# Altium PCB Mppt_PCB1.PcbDoc
Units mil, origin at the board's own origin, x right, y up, seen from the top; angles counter-clockwise.
Board outline 6000 x 4000 mil, 2 copper layers (Top Layer, Bottom Layer); 73 components, 45 nets, 234 pads, 35 vias.
Unrouted connection lines stored in the file: 1.
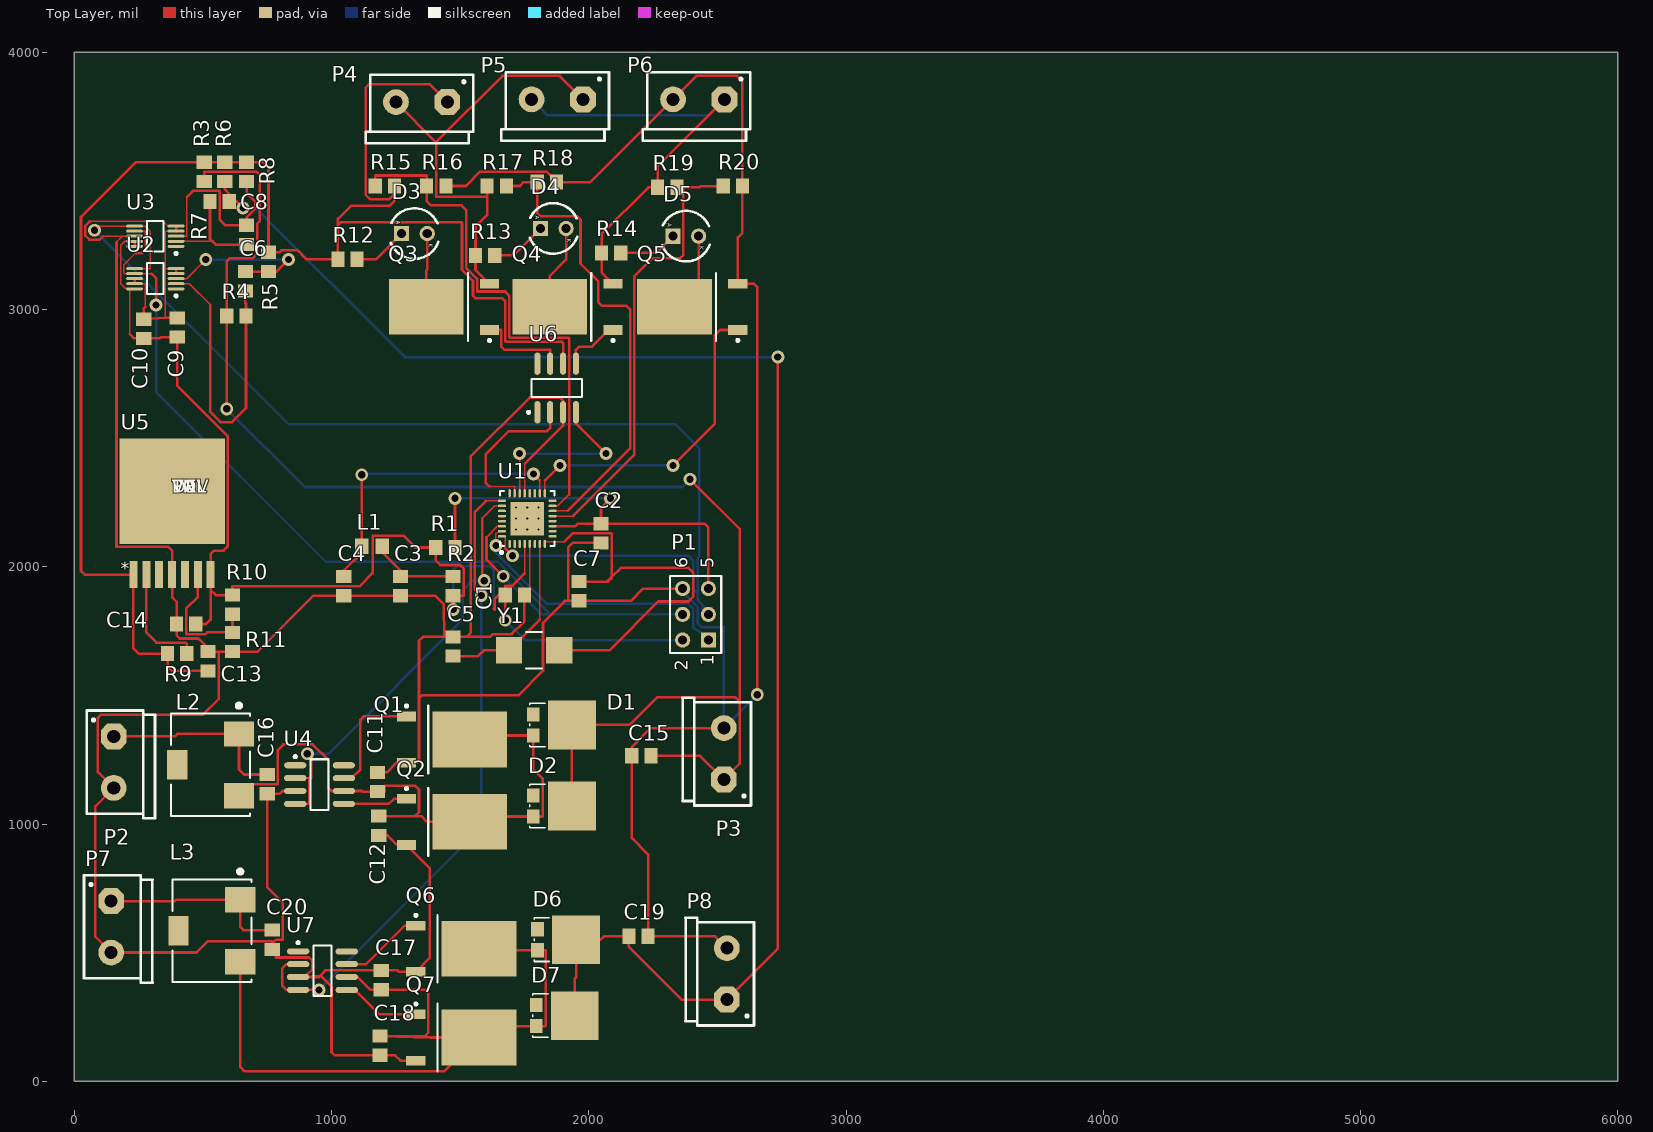
[diagram p0: Top Layer view]
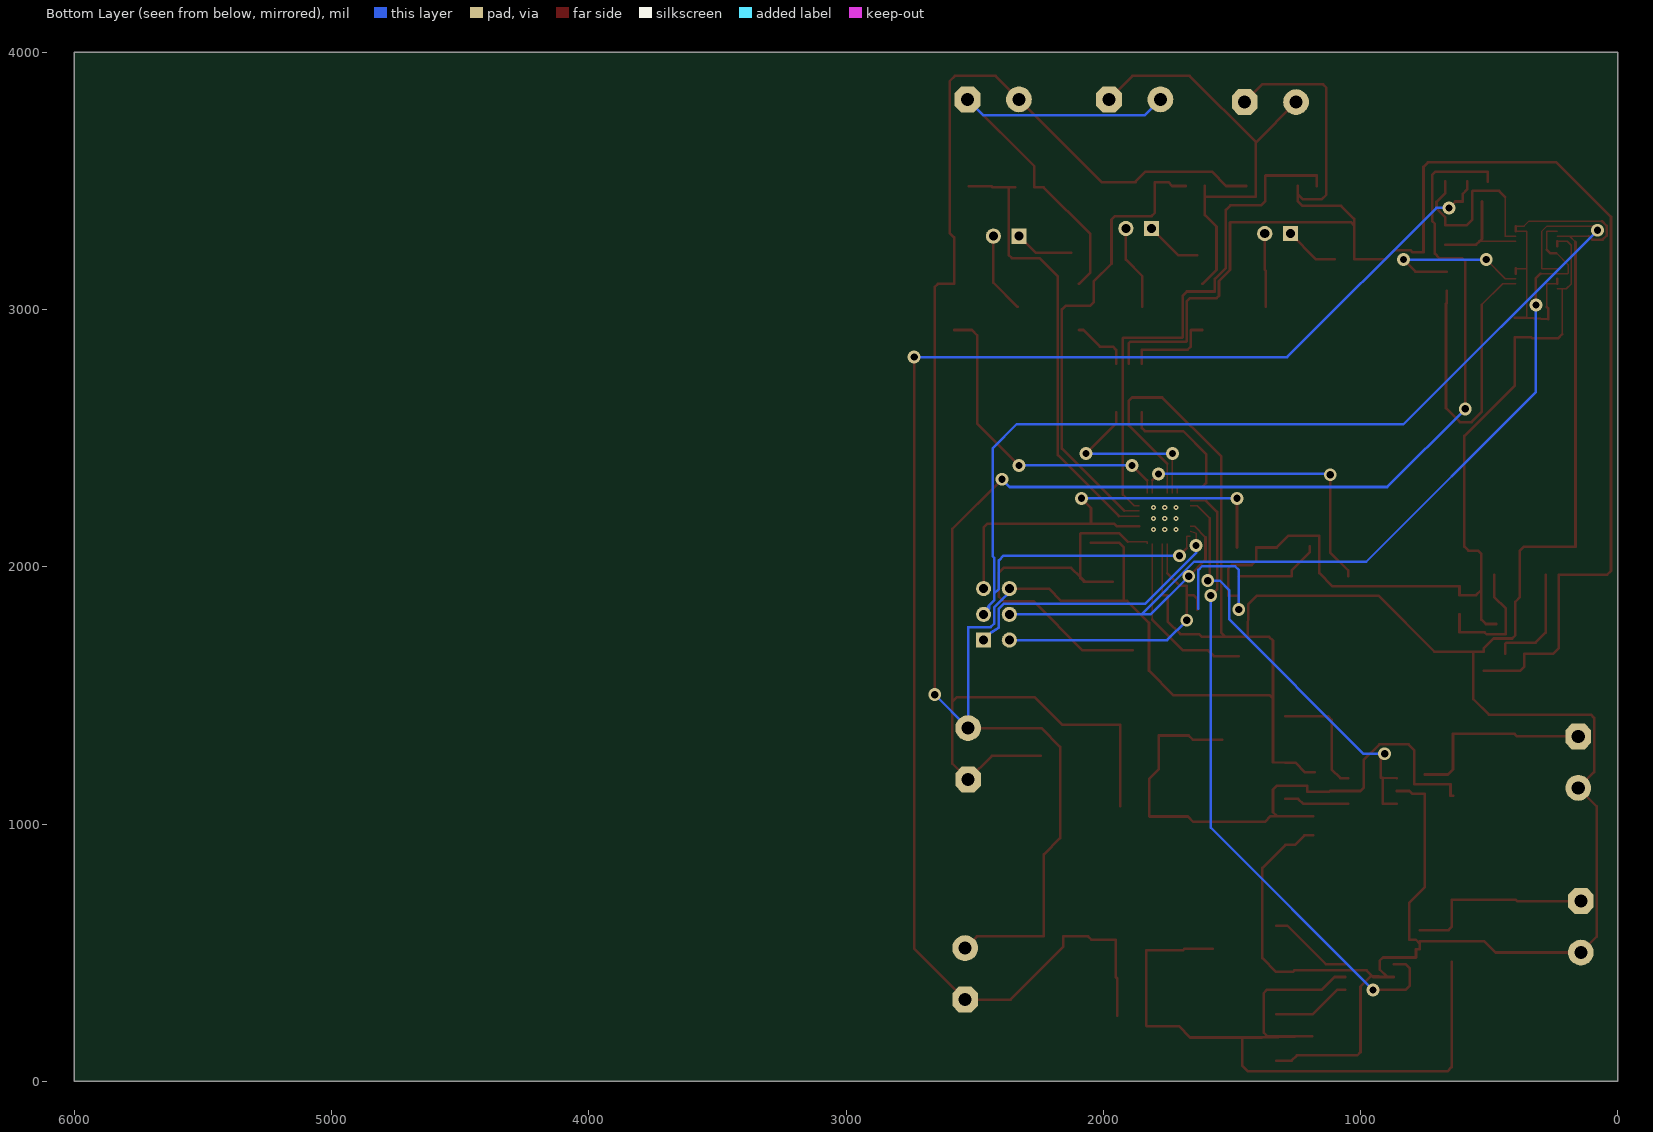
[diagram p1: Bottom Layer view, seen from below]
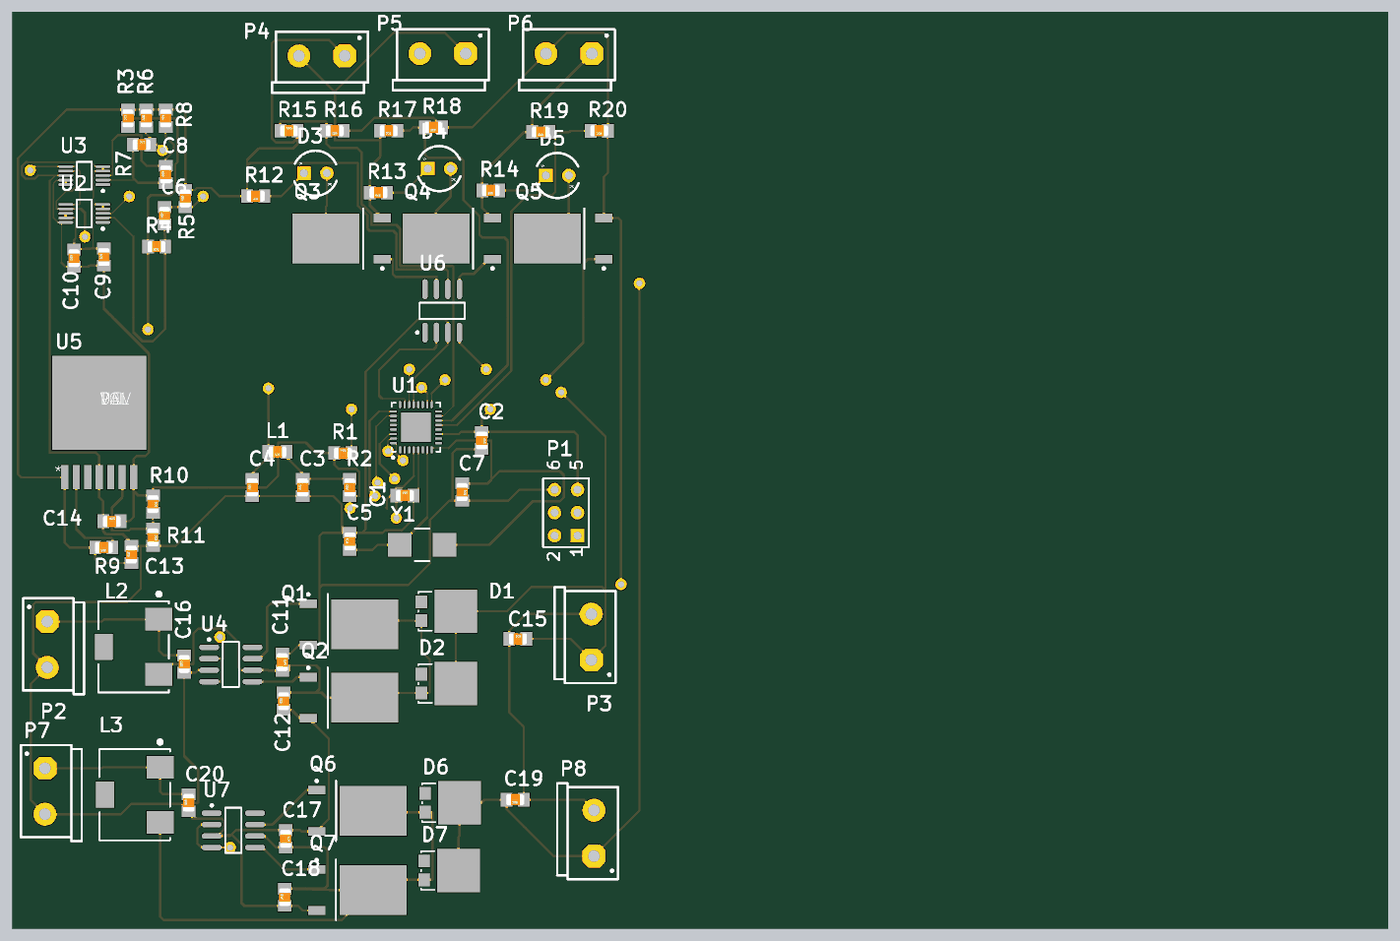
[diagram p2: 3D render of the assembled board from above, using the file's embedded part models]

## Layer stack, top to bottom
Top Solder: solder mask 0.4, Solder Resist, Dk 3.5
Top Layer: signal copper 1.4
Dielectric 1: dielectric 12.6, FR-4, Dk 4.8
Bottom Layer: signal copper 1.4
Bottom Solder: solder mask 0.4, Solder Resist, Dk 3.5

## Board outline
0,0 6000,0 6000,4000 0,4000

## Design rules (kind name [scope] priority, off if disabled: settings)
Clearance [All] p1: gap=6
PolygonConnect [All] p1: connectstyle=Relief reliefconductorwidth=10 reliefentries=4 polygonreliefangle="90 Angle" airgapwidth=10
RoomDefinition Balancer [InComponentClass('Balancer')] p1: confinementstyle=ConfineIn formatcopy=TRUE lockcomponents=FALSE outline 2680,2490 2680,3980 850,3980 850,2490
RoomDefinition Mppt_Sheet1 [InComponentClass('Mppt_Sheet1')] p2: confinementstyle=ConfineIn formatcopy=TRUE lockcomponents=FALSE outline 2600,1545 2600,2480 887.52,2480 887.52,1545
RoomDefinition CurrentSensor [InComponentClass('CurrentSensor')] p3: confinementstyle=ConfineIn formatcopy=TRUE lockcomponents=FALSE outline 825,2665 825,3770 30,3770 30,2665
RoomDefinition Buck [InComponentClass('Buck')] p4: confinementstyle=ConfineIn formatcopy=TRUE lockcomponents=FALSE outline 70,1515 850,1515 850,2630 70,2630
RoomDefinition Boost [InComponentClass('Boost')] p5: confinementstyle=ConfineIn formatcopy=TRUE lockcomponents=FALSE outline 24.03,3.28 2668.49,3.28 2668.49,1522.68 24.03,1522.68
RoutingVias [All] p1: holewidth=28 width=50 viastyle="Through Hole" minholewidth=28 minwidth=50 maxholewidth=28 maxwidth=50
SMDNeckDown [All] p1: percent=50.000
SolderMaskExpansion [All] p1: expansion=4
Width [All] p1: maxlimit=10 minlimit=4.92 preferedwidth=10
29 further rules are at their usual default settings.

## Classes and differential pairs
component class Balancer: D3 D4 D5 P4 P5 P6 Q3 Q4 Q5 R12 R13 R14 R15 R16 R17 R18 R19 R20 U6
component class Boost: C11 C12 C15 C16 C17 C18 C19 C20 D1 D2 D6 D7 L2 L3 P2 P3 P7 P8 Q1 Q2 Q6 Q7 U4 U7
component class Buck: C13 C14 R9 R10 R11 U5
component class CurrentSensor: C6 C8 C9 C10 R3 R4 R5 R6 R7 R8 U2 U3
component class Mppt_Sheet1: C1 C2 C3 C4 C5 C7 L1 P1 R1 R2 U1 Y1
net class Power: GND NetC13_1 NetC16_2 NetC20_2 NetP4_2

## Components (designator, comment, footprint, x,y, rotation, side; value= is the part's Value field where it differs from the comment)
C1 "Cap_cer_100n_50V" _0805 1712.52,1890 r0 top
C2 "Cap_cer_10n_50V" _0805 2047.52,2130 r270 top
C3 "Cap_cer_100n_50V" _0805 1267.52,1925 r90 top
C4 "Cap_cer_100n_50V" _0805 1047.52,1925 r90 top
C5 "Cap_cer_12p_50V" _0805 1472.52,1690 r90 top
C6 "Cap_cer_10n_50V" _0805 665,3110 r90 top
C7 "Cap_cer_12p_50V" _0805 1962.52,1905 r270 top
C8 "Cap_cer_10n_50V" _0805 670,3290 r90 top
C9 "Cap_cer_100n_50V" _0805 400,2930 r90 top
C10 "Cap_cer_100n_50V" _0805 270,2925 r90 top
C11 "Cap_cer_4.7u_50V" _0805 1178.49,1163.28 r270 top
C12 "Cap_cer_100n_50V" _0805 1183.49,993.28 r90 top
C13 "Cap_cer_10n_50V" _0805 520,1632.6 r90 top
C14 "Cap_cer_100n_50V" _0805 435,1777.6 r0 top
C15 "Cap_cer_100n_50V" _0805 2204.76,1265.08 r0 top
C16 "Cap_cer_100n_50V" _0805 749.76,1155.08 r90 top
C17 "Cap_cer_4.7u_50V" _0805 1193.49,393.28 r270 top
C18 "Cap_cer_100n_50V" _0805 1188.49,138.28 r90 top
C19 "Cap_cer_100n_50V" _0805 2193.49,563.28 r180 top
C20 "Cap_cer_100n_50V" _0805 769.76,550.08 r90 top
D1 "V10P45S" TO-277A 1893.31,1385.08 r270 top
D2 "V10P45S" TO-277A 1893.31,1070.08 r270 top
D3 "LED_5mm" LED_5MM 1322.17,3300.24 r270 top
D4 "LED_5mm" LED_5MM 1862.17,3320.24 r270 top
D5 "LED_5mm" LED_5MM 2377.17,3290.24 r270 top
D6 "V10P45S" TO-277A 1909.76,550.08 r270 top
D7 "V10P45S" TO-277A 1904.76,255.08 r270 top
L1 "IND_47u_0A055" COIL_0805 1157.52,2080 r180 top
L2 "HCF1007" HCF1007 530,1230 r270 top
L3 "HCF1007" HCF1007 535,585 r270 top
P1 "Header 3X2" HDR2X3 2465,1715 r90 top
P2 "WRTBL_2P_508" WRTBL_2P_508 145,1240 r270 top
P3 "WRTBL_2P_508" WRTBL_2P_508 2533.49,1273.28 r90 top
P4 "WRTBL_2P_508" WRTBL_2P_508 1350,3815 r180 top
P5 "WRTBL_2P_508" WRTBL_2P_508 1877.17,3825.24 r180 top
P6 "WRTBL_2P_508" WRTBL_2P_508 2427.17,3825.24 r180 top
P7 "WRTBL_2P_508" WRTBL_2P_508 135,600 r270 top
P8 "WRTBL_2P_508" WRTBL_2P_508 2545.16,417.91 r90 top
Q1 "IRFR024N" TO-252AA_N 1468.49,1328.28 r0 top
Q2 "IRFR024N" TO-252AA_N 1468.49,1008.28 r0 top
Q3 "IRFR024N" TO-252AA_N 1437.17,3010.24 r180 top
Q4 "IRFR024N" TO-252AA_N 1917.17,3010.24 r180 top
Q5 "IRFR024N" TO-252AA_N 2402.17,3010.24 r180 top
Q6 "IRFR024N" TO-252AA_N 1505,515 r0 top
Q7 "IRFR024N" TO-252AA_N 1504.76,170.08 r0 top
R1 "Res_0805" _0805 1442.52,2075 r0 top
R2 "Res_0805" _0805 1472.52,1925 r90 top
R3 "Res_0805" _0805 505,3535 r90 top
R4 "Res_0805" _0805 630,2975 r180 top
R5 "Res_0805" _0805 755,3185 r90 top
R6 "Res_0805" _0805 585,3535 r90 top
R7 "Res_0805" _0805 565,3420 r0 top
R8 "Res_0805" _0805 670,3535 r90 top
R9 "Res_0805" _0805 400,1662.6 r180 top
R10 "Res_0805" _0805 615,1852.6 r270 top
R11 "Res_0805" _0805 615,1707.6 r270 top
R12 "Res_0805" _0805 1062.17,3195.24 r180 top
R13 "Res_0805" _0805 1597.17,3210.24 r180 top
R14 "Res_0805" _0805 2087.17,3220.24 r180 top
R15 "Res_0805" _0805 1207.17,3480.24 r0 top
R16 "Res_0805" _0805 1407.17,3480.24 r180 top
R17 "Res_0805" _0805 1642.17,3480.24 r180 top
R18 "Res_0805" _0805 1837.17,3495.24 r180 top
R19 "Res_0805" _0805 2305,3475 r180 top
R20 "Res_0805" _0805 2560,3480 r180 top
U1 "ATtiny26L-8MU" 32M1-A_N 1760.83,2187.4 r90 top
U2 "MAX9611AUB+" MAXM-U10+2_N 315,3120 r180 top
U3 "MAX9611AUB+" MAXM-U10+2_N 315,3285 r180 top
U4 "MAX4427ESA" NSO8_N 953.49,1153.28 r0 top
U5 "LMZ12001_NDW_7" TZA07A 380,2287.6 r0 top
U6 "MAX4427ESA" NSO8_N 1875,2695 r90 top
U7 "MAX4427ESA" NSO8_N 964.76,430.08 r0 top
Y1 "Crystal_16.0MHz" XTAL_SMD 1787.52,1675 r180 top

## Footprints (in the part's own frame and the unit in brackets; to place one, negate y for a bottom-side part, rotate by r counter-clockwise, add the part's x,y. Pads: shape width x height; smd on the part's side, far side on the other; paste and mask are expansions set on the pad)
32M1-A_N [mm] "QFN, 32-Leads, Body 5x5mm, Pitch 0.5mm, Thermal Pad 3.3x3.3mm, IPC Medium Density"
  oval 0.8x0.25 smd: 1(-2.5,1.75) 2(-2.5,1.25) 3(-2.5,0.75) 4(-2.5,0.25) 5(-2.5,-0.25) 6(-2.5,-0.75) 7(-2.5,-1.25) 8(-2.5,-1.75) 17(2.5,-1.75) 18(2.5,-1.25) 19(2.5,-0.75) 20(2.5,-0.25) 21(2.5,0.25) 22(2.5,0.75) 23(2.5,1.25) 24(2.5,1.75)
  oval 0.25x0.8 smd: 9(-1.75,-2.5) 10(-1.25,-2.5) 11(-0.75,-2.5) 12(-0.25,-2.5) 13(0.25,-2.5) 14(0.75,-2.5) 15(1.25,-2.5) 16(1.75,-2.5) 25(1.75,2.5) 26(1.25,2.5) 27(0.75,2.5) 28(0.25,2.5) 29(-0.25,2.5) 30(-0.75,2.5) 31(-1.25,2.5) 32(-1.75,2.5)
  rect 3.3x3.3 smd: 33(0,0)
  silkscreen extent -3.47,-2.7 2.7,2.7, body extent -2.55,-2.55 2.55,2.55, height 1
_0805 [mm]
  rect 1.3x1.5 smd: 1(-0.95,0) 2(0.95,0)
  body extent -1,-0.64 1,0.62, height 0.78
COIL_0805 [mm]
  rect 1.3x1.5 smd: 1(-1.014,0) 2(1.014,0)
  body extent -1,-0.64 1,0.62, height 0.78
HCF1007 [mm]
  rect 2.5x3 smd: 1(-3.05,2.8) 2(3.05,2.8)
  rect 2.9x2 smd: ""(0,-3.3)
  silkscreen extent -6.04,-3.9 5.05,3.9
HDR2X3 [mm] "Connector; Header; 3x2 Position"
  rect 1.5x1.5 hole 0.9: 1(0,0)
  round 1.5 hole 0.9: 2(0,2.54) 3(2.54,0) 4(2.54,2.54) 5(5.08,0) 6(5.08,2.54)
  silkscreen extent -1.27,-1.27 6.35,3.81, body extent -0.3,-0.29 5.38,2.84, height 7
LED_5MM [mm]
  rect 1.5x1.5 hole 0.9: 1(0.127,-1.27)
  round 1.5 hole 0.9: 2(0.127,1.27)
  silkscreen extent -2.37,-2.33 2.63,2.36, body extent -2.36,-2.49 2.62,2.5, height 8.5
MAXM-U10+2_N [mm] "SOP, 10-Leads, Body 3x3mm, Pitch 0.5mm, IPC Medium Density"
  oval 1.65x0.3 smd: 1(-2.05,1) 2(-2.05,0.5) 3(-2.05,0) 4(-2.05,-0.5) 5(-2.05,-1) 6(2.05,-1) 7(2.05,-0.5) 8(2.05,0) 9(2.05,0.5) 10(2.05,1)
  silkscreen extent -2.18,-1.53 0.82,1.82, body extent -1.55,-1.55 1.55,1.55, height 1.1
NSO8_N [mm] "SOIC, 8-Leads, Body 4.9x3.9mm, Pitch 1.27mm, IPC Medium Density"
  oval 2.2x0.6 smd: 1(-2.4,1.905) 2(-2.4,0.635) 3(-2.4,-0.635) 4(-2.4,-1.905) 5(2.4,-1.905) 6(2.4,-0.635) 7(2.4,0.635) 8(2.4,1.905)
  silkscreen extent -2.52,-2.5 0.9,2.88, body extent -2,-2.5 2,2.5, height 1.75
TO-252AA_N [mm] "D-PAK, 4-Leads, Body 6.1x6.5mm, Pitch 2.28mm, Lead Span 9.9mm, IPC Medium Density"
  rect 1.9x0.95 smd: 1(-4.5,2.28) 3(-4.5,-2.28)
  rect 7.4x5.5 smd: 4(1.75,0)
  silkscreen extent -4.62,-3.35 -2.35,3.43, body extent -2.25,-3.37 4.1,3.37, height 2.38
TO-277A [mm]
  rect 1.4x1.27 smd: 1(1.04,-2.765) 2(-1.04,-2.765)
  rect 4.8x4.72 smd: K(0,1.04)
  silkscreen extent -2.15,-3.1 2.15,-1.6
TZA07A [mil]
  rect 31x105 smd: 1(-150,-318) 2(-100,-318) 3(-50,-318) 4(0,-318) 5(50,-318) 6(100,-318) 7(150,-318)
  rect 410x410 smd: 8(0,6)
WRTBL_2P_508 [mm]
  oct 2.54x2.54 hole 1.3: 1(-2.549,0.212)
  round 2.54 hole 1.3: 2(2.531,0.212)
  silkscreen extent -5.11,-2.47 5.51,4.29, body extent -4.83,-2.41 5.21,4.27, height 13.97
XTAL_SMD [mm]
  rect 2.6x2.6 smd: 1(-2.476,0) 2(2.476,0)
  silkscreen extent -0.8,-1.8 0.8,1.8, body extent -2.4,-1.8 2.4,1.8, height 1.4

## Part data
C1 C3 C4 C9 C10 C11 C12 C14 C15 C16 C17 C18 C19 C20: library part Cap_124
C2 C6 C8 C13: library part Cap_120
C5 C7: library part Cap_109
D1 D2 D6 D7: "V01P45 Shottky Diode"
D3 D4 D5: library part DIODE_41
L1: library part Ind_41, "Inductor"
L2 L3: "HCF1007 Inductor"
P1: library part Con_41
P2 P3 P4 P5 P6 P7 P8: library part Con_7
Q1 Q2 Q3 Q4 Q5 Q6 Q7: "HEXFET N-Channel Power MOSFET"
R1 R2 R3 R4 R5 R6 R7 R8 R9 R10 R11 R12 R13 R14 R15 R16 R17 R18 R19 R20: library part Res_6
U1: "8-bit AVR Microcontroller, 2.7-5.5V, 8MHz, 2KB Flash, 128 Bytes EEPROM, 128 Bytes SRAM, 32-pin MLF, Industrial Grade (-40°C to 85°C), Pb-Free"
U2 U3: "High-side Current-Sense Amplifier with 12-bit I2C ADC and Op Amp / Comparator - Non-inverting, Adjustable Gain, -40 to 125 degC, 10-Pin SOP (U10+2), Pb-Free"
U4 U6 U7: "Dual High-Speed 1.5A MOSFET Driver"
U5: "Imported"
Y1: library part Crystal_19

## Via types
v1: diameter 50, hole 28, Top Layer to Bottom Layer, 26 vias
v2: diameter 19.68, hole 7.87, Top Layer to Bottom Layer, 9 vias

## Nets (pads, with @x,y where several pads share a name; then routed paths per layer and width w, separated by ;. In a path a pad name is that pad's centre, name@x,y a point inside that pad or via, vN(x,y) a via of type N, cw(c..) or ccw(c..) an arc to the next point about the centre after c; other vN are vias at no path point)
+5V: C1.1 C9.1 C10.1 C14.2 P1.2 R1.1 R2.1 R10.1 U1.4 U2.10 U3.9 U3.10 U5.7 | length 5063
  Top Layer w4.92: 1750.99,1974.44 U1.4
  Top Layer w5.91: 215.52,2904.08 U2.10@215.52,3080.63 ; U2.10 U2.10@215.52,3080.63 ; U3.9 196.27,3265.31 180.95,3250 180.95,3099.68 200,3080.63 U2.10@215.52,3080.63
  Top Layer w10: 215.52,2904.08 232,2887.6 C10.1 332,2887.6 337,2892.6 C9.1 400,2705 596,2509 596,2078 580.5,2062.5 542.5,2062.5 530,2050 U5.7 530,1910 ; U3.10 U3.9 ; C14.2 512.5,1777.6 530,1795.1 530,1910 ; v1(1473,1834) 1472.52,1834.48 R2.1 1513,1887.6 1514,1888.6 1514,1993 1500,2007 1423.12,2007 1405.12,2025 R1.1 1326,2075 1280,2121 1161,2121 1160,2120 1160,1975 1110,1925 616,1925 615,1924 R10.1 550,1890 530,1910 ; 1630,1837 1634,1833 1634,1875 1649,1890 C1.1 ; v1(1675.12,1791.88) C1.1 ; 1750.99,1974.44 1703.52,1926.98 1677,1926.98 1675.12,1925.09 C1.1
  Bottom Layer w10: v1(1473,1834) 1473,1987.5 1487.5,2002 1615.5,2002 1630,1987.5 1630,1837 ; v1(1675.12,1791.88) 1752,1715 P1.2
GND: C1.2 C2.2 C3.1 C4.1 C5.2 C7.2 C9.2 C10.2 C11.1 C12.1 C13.2 C14.1 C15.1 C16.1 C17.1 C18.1 C19.1 C20.1 P1.6 P2.2 P3.2 P6.2 P7.2 P8.2 Q1.3 Q2.3 Q5.3 Q6.3 Q7.3 R11.2 R16.1 R18.1 R20.1 U1.5 U1.21 U2.4 U2.5 U2.8 U2.9 U3.4 U3.5 U3.8 U4.3 U5.4 U6.3 U7.3 | length 20597
  Top Layer w4.92: U1.21 1750.99,2400 ; C1.2@1770.67,1890 U1.5
  Top Layer w5.91: 61.55,3344 344.37,3344 364,3324.37 U3.5 ; 112.5,3285 186.5,3285 ; 164,3262.5 186.5,3285 ; U2.9 275,3100.31 276,3099.31 276,3010 ; U3.8 186.5,3285 ; 353,2968.4 353,3158.37 354,3159.37 U2.5 353,3160.37 354,3304.69 U3.4
  Top Layer w10: 61.55,3344 42.55,3325 42.55,3287.5 58.54,3271.51 99.01,3271.51 112.5,3285 ; 164,3262.5 164,2078 165,2077 365.5,2077 380,2062.5 U5.4 380,1881.6 397.6,1864 C14.1 397.6,1733.82 410.35,1721.07 482.93,1721.07 520,1684 C13.2 560,1670 ; U2.9 U2.8 ; 276,3010 270,3004 C10.2 356.4,2967.4 ; 353,2968.4 354,2967.4 356.4,2967.4 ; U2.4 U2.5 ; U3.4 U3.5 ; C9.2 356.4,2967.4 ; U4.3 809.61,1128.28 799,1117.68 C16.1 749.76,754.24 811,693 811,551 810,550 784.76,550 C20.1@769.76,535 ; C11.1 1215,1200.69 1252.83,1238.52 Q1.3 1340,1239.52 1340,1487.5 ; C12.1 1218,955.88 1255.36,918.52 Q2.3 1381,828.84 1381,478.4 Q6.3 1262.45,425.24 1257,430.68 C17.1 976.68,430.68 956.79,410.79 ; Q7.3 1267.57,80.31 1247,100.88 C18.1 1012.5,100.88 1000,113.38 1000,367.58 956.79,410.79 ; R16.1 1522.28,3480.24 1578.04,3536 1836,3536 1874.57,3497.43 R18.1 2005.87,3495.24 P6.2 2418.63,3908 2576.9,3908 2597.4,3887.5 R20.1 2597.4,3298.07 2579.33,3280 Q5.3 2642.5,3100 2655,3087.5 v1(2655,1502.76) ; 1750.99,2400 1900,2549.01 U6.3 1900,2645.5 1887.5,2658 1771,2658 1541,2428 1541,1743.4 1525,1727.4 ; C1.2@1770.67,1890 C1.2 1749.92,1787.92 1700,1738 1627,1738 1616.4,1727.4 1525,1727.4 ; C2.2 1937.5,2092.6 1921,2076.1 1921,1868.6 1922,1867.6 ; P1.6 2211.4,1915 2164,1867.6 C7.2 1922,1867.6 ; P3.2 2240.28,1372.91 2167.36,1300 C15.1 2167.36,945.53 2230.89,882 C19.1 2491.08,563.28 P8.2 ; 560,1670 567,1670 567.2,1670.2 R11.2 713.2,1670.2 930.6,1887.6 C4.1 C3.1 1401.4,1887.6 1436.6,1852.4 1438,1727.4 ; 560,1670 561,1669 561,1485 501,1425 104.5,1425 92,1412.5 92,1201.7 P2.2 82,1069.04 82,561.7 P7.2 474.37,500.37 519,545 768.76,545 769.76,544 C20.1@769.76,535 ; C20.1@769.76,535 C20.1 784,512.68 784,482 785,481 912.5,481 925,468.5 925,434.5 U7.3@897.37,406.87 ; U7.3@895.58,405.08 U7.3@897.37,406.87 ; U7.3@895.58,405.08 951.08,405.08 956.79,410.79 ; U7.3@895.58,405.08 U7.3 U7.3@897.37,406.87 ; U7.3@897.37,406.87 956.79,410.79 ; 1340,1487.5 1340,1712.5 1354.9,1727.4 1438,1727.4 ; 1340,1487.5 1352.5,1500 1726,1500 1822,1596 1822,1782 1907.6,1867.6 1922,1867.6 ; 1438,1727.4 C5.2 1525,1727.4
  Bottom Layer w10: P1.6 2365,1900.55 2393.55,1872 2394.13,1872 2424,1842.13 2424,1778.5 2437.5,1765 2525,1765 2525.16,1764.84 P3.2 v1(2655,1502.76)
NetC2_1: C2.1 P1.5 R1.2 U1.11 | length 1763.5
  Top Layer w10: R1.2 v1(1479.92,2266) ; U1.11 1948,2157.87 1957.53,2167.4 C2.1 ; v1(2085.02,2266) 2047.52,2228.5 C2.1 ; P1.5 2465,2152.4 2450,2167.4 C2.1
  Bottom Layer w10: v1(1479.92,2266) v1(2085.02,2266)
NetC3_2: C3.2 L1.1 R2.2 | length 351.6
  Top Layer w10: L1.1 1197.42,2056.1 1267.52,1986 C3.2 R2.2
NetC4_2: C4.2 L1.2 U1.18 | length 1178.6
  Top Layer w4.92: U1.18 1810.04,2335.96
  Top Layer w10: C4.2 1047.52,1986 1117.62,2056.1 L1.2 v1(1117.62,2357.62) ; v1(1785,2361) 1810.04,2335.96
  Bottom Layer w10: v1(1117.62,2357.62) 1121,2361 v1(1785,2361)
NetC5_1: C5.1 U1.7 Y1.2 | length 690.5
  Top Layer w4.92: 1810.04,1795 U1.7
  Top Layer w10: C5.1 1570,1652.6 1592.4,1675 Y1.2 1810.04,1795
NetC6_1: C6.1 R4.1 U2.2 | length 1218
  Top Layer w5.91: U2.2 447.19,3100.31 529,3018.5
  Top Layer w10: 529,3018.5 529,2602 568.5,2562.5 613.5,2562.5 667.4,2616.4 R4.1 667.4,3022 665,3024.4 C6.1
NetC6_2: C6.2 R5.1 U2.3 | length 655.2
  Top Layer w5.91: U2.3 437,3120 v1(511,3194)
  Top Layer w10: C6.2 698.47,3147.4 698.67,3147.6 R5.1 786.6,3147.6 v1(833,3194)
  Bottom Layer w10: v1(511,3194) v1(833,3194)
NetC7_1: C7.1 U1.8 Y1.1 | length 1652.1
  Top Layer w4.92: U1.8 1829.73,2097 1904,2097
  Top Layer w10: Y1.1 2080,1675 2270,1865 2387.5,1865 2406,1883.5 2406,1977.5 2387.5,1996 2125,1996 2089,1960 ; 1904,2097 1937,2130 2088,2130 2089,2129 2089,1960 ; C7.1 2071.4,1942.4 ; 2071.4,1942.4 2089,1960 ; 2071.4,1942.4 2075,1942.4 2089,1956.4 2089,1960
NetC8_1: C8.1 R7.1 U3.2 | length 438.3
  Top Layer w5.91: U3.2 537.28,3265.31
  Top Layer w10: R7.1 527.6,3275 537.28,3265.31 550,3252.6 C8.1
NetC8_2: C8.2 R8.1 U3.3 | length 754.5
  Top Layer w5.91: U3.3 437,3285 438,3286 438,3437.5
  Top Layer w10: 438,3437.5 461.5,3461 564,3461 565,3460 565,3349.9 587.5,3327.4 C8.2 670,3358 704.5,3392.5 704.5,3418.72 670,3453.22 R8.1
NetC11_2: C11.2 C12.2 D1.1 D2.1 L2.2 Q1.4 Q2.4 U4.6 | length 2402.6
  Top Layer w10: L2.2 650,1109.92 650,1155 790,1155 791,1156 791,1287.5 812.96,1309.46 926.75,1309.46 987.5,1248.71 987.5,1140.78 1000,1128.28 U4.6 1118.28,1128.28 1120.69,1125.88 C11.2 1207,1125.88 1207,1149 1325,1149 1340,1134 1340,1045.69 1325,1030.69 ; C12.2 1325,1030.69 ; Q1.4 1652,1328.28 1667.85,1344.13 D1.1 1784.45,1212.55 1821,1176 1821,1030.13 1820,1029.13 D2.1 1670.85,1029.13 1650,1008.28 Q2.4 1371.4,1008.28 1349,1030.69 1325,1030.69
NetC13_1: C13.1 P4.1 R3.2 R5.2 R6.2 R8.2 R9.2 R12.2 R15.2 U5.1 U6.6 | length 6419.9
  Top Layer w10: U5.1 U5.1@230,1969 ; C13.1 379.9,1595.2 362.6,1612.5 R9.2 250,1662.6 230,1682.6 U5.1@230,1969 ; R15.2 1244.57,3448.57 ; P4.1 1382.04,3875 1145.5,3875 1133,3862.5 1133,3446 1150,3429 1225,3429 1244.57,3448.57 ; U6.6 1900,2869 1894.03,2874.97 1676.63,2874.97 1675.6,2876 1675.6,3030.9 1662.5,3044 1559,3044 1549.93,3053.07 1549.93,3110.95 1507.17,3153.71 1507.17,3337.5 1504.64,3340.03 1037.5,3340.03 1024.76,3327.29 ; U5.1@230,1969 41,1969 26,1984 26,3360 238.4,3572.4 R3.2 R6.2 585,3573 627,3573 627.6,3572.4 R8.2 737.5,3572.4 755,3554.9 R5.2 797.05,3222.4 805.6,3230.96 867.45,3230.96 903.17,3195.24 R12.2 1024.76,3327.29 ; 1024.76,3327.29 1024.76,3352.76 1075,3403 1225,3403 1244.57,3422.57 1244.57,3448.57
NetC15_2: C15.2 D1.K D2.K P3.1 R3.1 R4.2 | length 5824.9
  Top Layer w10: R3.1 505,3534 506,3535 710,3535 720.5,3524.5 720.5,3343 711,3333.5 711,3217 694,3200 605.1,3200 592.6,3187.5 R4.2 v1(592.6,2613.9) ; D2.K D1.K 2159.08,1385.08 2266,1492 2570,1492 2587,1475 ; C15.2 2432.99,1265.08 P3.1 2587,1234.76 2587,1475 ; v1(2394,2340) 2587,2147 2587,1475
  Bottom Layer w10: v1(592.6,2613.9) 896.5,2310 2364,2310 v1(2394,2340)
NetC16_2: C16.2 L2.1 P2.1 | length 746.5
  Top Layer w10: P2.1 391,1340.37 400.71,1350.08 L2.1 640.24,1212.26 660.02,1192.48 C16.2
NetC17_2: C17.2 C18.2 D6.1 D7.1 L3.2 Q6.4 Q7.4 U7.6 | length 3255.7
  Top Layer w10: L3.2 645.24,55.26 662.5,38 1437.5,38 1460,60.5 Q7.4@1460,170.08 ; U7.6 1101,405.08 1150.2,355.88 C17.2 1362.5,355.88 1376,342.38 1376,189.18 1362.5,175.68 C18.2 1383.61,170.08 Q7.4@1460,170.08 ; Q6.4 1684,515 1689.87,509.13 D6.1 1831,509.13 1832,508.13 1832,215.13 1831,214.13 D7.1 1706.06,214.13 1662,170.08 Q7.4 Q7.4@1460,170.08
NetC19_2: C19.2 D6.K D7.K P8.1 R6.1 R7.2 | length 6062.2
  Top Layer w10: R6.1 585,3467.4 602.4,3450 R7.2 631,3420 v1(656,3395) ; D7.K 1945.71,400 1950.71,405 D6.K 2046,550.08 2059.21,563.28 C19.2 2156.09,522 2360.54,317.54 P8.1 2735,515.72 v1(2735,2815)
  Bottom Layer w10: v1(656,3395) 705.01,3395 1285.01,2815 v1(2735,2815)
NetC20_2: C20.2 L3.1 P7.1 | length 738.8
  Top Layer w10: P7.1 391,700.37 395.71,705.08 L3.1 645.24,599.76 657.52,587.48 C20.2
NetD3_1: D3.1 R12.1 | length 214
  Top Layer w10: R12.1 1172.17,3195.24 D3.1
NetD3_2: D3.2 Q3.4 | length 286.6
  Top Layer w10: Q3.4 1368.27,3150 1372.17,3153.9 D3.2
NetD4_1: D4.1 R13.1 | length 221.1
  Top Layer w10: R13.1 1707.17,3210.24 D4.1
NetD4_2: D4.2 Q4.4 | length 331.5
  Top Layer w10: Q4.4 1848.27,3130 1912.17,3193.9 D4.2
NetD5_1: D5.1 R14.1 | length 229.5
  Top Layer w10: R14.1 2262.17,3220.24 D5.1
NetD5_2: D5.2 Q5.4 | length 313.9
  Top Layer w10: Q5.4 2427.17,3104.13 D5.2
NetP1_1: P1.1 U1.31 | length 1110.4
  Top Layer w4.92: v1@1638,2084 1638,2130.89 U1.31
  Top Layer w10: v1@1638,2084 v1(1639,2083)
  Bottom Layer w10: v1(1639,2083) 1639,2054 1837,1856 2387.5,1856 2406.81,1836.69 2406.81,1762.5 2434.52,1745.48 P1.1
NetP1_3: P1.3 U1.32 U2.6 U3.6 | length 4791.8
  Top Layer w4.92: U1.32 1674.54,2118.5 1674.54,2072.46
  Top Layer w5.91: v1@95.37,3324.37 U3.6 275,3324.37 296,3303.37 296,3160.37 295,3159.37 U2.6
  Top Layer w10: v1(79,3308) v1@95.37,3324.37 ; 1674.54,2072.46 v1(1704,2043)
  Bottom Layer w10: v1(79,3308) 833,2554 2336.52,2554 2430,2460.52 2430,2041 2424,2035 2424,1895.66 ; v1(1704,2043) 2388,2043 2406,2025 2406,1913.66 2424,1895.66 ; 2424,1895.66 2424,1869.5 2443.53,1849.97 ; 2443.53,1849.97 P1.3 2443.53,1836.47 2443.53,1849.97
NetP1_4: P1.4 U1.30 U2.7 U3.7 | length 3736.3
  Top Layer w4.92: 1602.54,2115.41 1645,2157.87 U1.30
  Top Layer w5.91: U3.7 275,3304.69 276,3303.69 276,3233 ; 238.36,3219.5 192.86,3174 192.86,3140.83 194,3139.69 U2.7 300,3139.69
  Top Layer w10: 238.36,3219.5 262.5,3219.5 276,3233 ; 300,3139.69 318,3121.69 v1(318,3018) ; 1602.54,2115.41 1602.54,2027.96 v1(1667.52,1962.98)
  Bottom Layer w10: v1(318,3018) 318,2679 977.5,2019.5 1647,2019.5 1851.5,1815 ; v1(1667.52,1962.98) 1815.5,1815 1851.5,1815 ; P1.4 1851.5,1815
NetP4_2: P4.2 P5.1 Q3.3 R13.2 R17.2 | length 1767.3
  Top Layer w10: P4.2 1407,3650.04 ; R17.2 1604.76,3440 ; Q3.3 1559.76,3154.57 R13.2 1559.76,3322 1604.76,3367 1604.76,3440 ; P5.1 1886.44,3908 1664,3908 1407,3651 1407,3650.04 ; 1407,3650.04 1407,3440 1408,3439 1603.76,3439 1604.76,3440
NetP5_2: P5.2 P6.1 Q4.3 R14.2 R19.2 | length 1755.4
  Top Layer w10: Q4.3 2049.76,3144.57 R14.2 2049.76,3292.76 2232,3475 R19.2 2267.6,3556.97 P6.1
  Bottom Layer w10: P5.2 1839.44,3755 2465.63,3755 P6.1
NetQ1_1: Q1.1 U4.7 | length 455.5
  Top Layer w10: U4.7 1077.78,1178.28 1112,1212.5 1112,1405.05 1125,1418.05 Q1.1
NetQ2_1: Q2.1 U4.5 | length 251.5
  Top Layer w10: U4.5 1222.24,1078.28 1242,1098.05 Q2.1
NetQ3_1: Q3.1 U6.7 | length 358.2
  Top Layer w10: Q3.1 1658.12,2920.47 1659.6,2919 1659.6,2855.9 1671.5,2844 1849,2844 1850,2843 U6.7
NetQ4_1: Q4.1 U6.5 | length 230.2
  Top Layer w10: U6.5 1950,2843.5 1962.5,2856 2012.53,2856 2077,2920.47 Q4.1
NetQ5_1: Q5.1 U1.17 | length 1242.8
  Top Layer w4.92: U1.17 1829.73,2336
  Top Layer w10: 1829.73,2336 v1(1887.73,2394) ; v1(2327,2394) 2490,2557 2490,2900 2510.47,2920.47 Q5.1
  Bottom Layer w10: v1(1887.73,2394) v1(2327,2394)
NetQ6_1: Q6.1 U7.7 | length 330.6
  Top Layer w10: U7.7 1135,455.08 1284.69,604.76 Q6.1
NetQ7_1: Q7.1 U7.5 | length 307.8
  Top Layer w10: U7.5 1091,355.08 1186.24,259.84 Q7.1
NetR9_1: R9.1 U5.2 | length 438.6
  Top Layer w10: U5.2 280,1744 318.93,1705.07 432.33,1705.07 437.4,1700 R9.1
NetR10_2: R10.2 R11.1 U5.6 | length 504.1
  Top Layer w10: U5.6 480,1882 435,1837 435,1738.07 436,1737.07 509,1737.07 516.93,1745 R11.1 R10.2
NetR15_1: R15.1 R16.2 U1.15 | length 2058.6
  Top Layer w4.92: U1.15 1879.61,2236.61 1924,2281
  Top Layer w10: R15.1 1169.76,3520 1170.76,3521 1368.76,3521 1369.76,3520 R16.2 1369.76,3422.74 1387.5,3405 1505.67,3405 1523.17,3387.5 1523.17,3161.83 1565.93,3119.07 1565.93,3071 1566.93,3070 1675,3070 1691.6,3053.4 1691.6,2892 1692.63,2890.97 1921.03,2890.97 1924,2888 1924,2281
NetR17_1: R17.1 R18.2 U1.14 | length 1852.9
  Top Layer w4.92: U1.14 1918,2216.93
  Top Layer w10: R17.1 1732,3480.24 1747,3495.24 R18.2 1799.76,3375.74 1812.5,3363 1955,3363 1968,3350 1968,3178 2037.5,3108.5 2037.5,3027.5 2050,3015 2145.6,3015 2160.6,3000 2160.6,2459.53 1918,2216.93
NetR19_1: R19.1 R20.2 U1.13 | length 1780.8
  Top Layer w4.92: U1.13 1939.24,2197.24
  Top Layer w10: 1939.24,2197.24 2176.6,2434.6 2176.6,3129 2247.6,3200 2355.5,3200 2368,3212.5 2368,3475 ; R19.1 2368,3475 ; R20.2 2435,3480 2430,3475 2368,3475
NetU1_22: U1.22 U6.4 | length 698.8
  Top Layer w4.92: U1.22 v1(1731.3,2440)
  Top Layer w10: U6.4 1950,2557 v1(2067,2440)
  Bottom Layer w10: v1(1731.3,2440) v1(2067,2440)
NetU1_23: U1.23 U6.2 | length 608.5
  Top Layer w4.92: 1612.5,2313 1711.62,2312 U1.23
  Top Layer w10: 1612.5,2313 1600,2325.5 1600,2438 1689,2527 1837.5,2527 1850,2539.5 U6.2
NetU1_25: U1.25 U7.2 U7.4 | length 2538.1
  Top Layer w4.92: 1600,2256.3 U1.25
  Top Layer w10: U7.2 825,455.08 808,438.08 808,372.08 825,355.08 U7.4 v1(951,355.08) ; v1(1582,1888) 1557.5,1912.5 1557.5,2213.8 1600,2256.3
  Bottom Layer w10: v1(951,355.08) 1582,986.08 v1(1582,1888)
NetU1_26: U1.26 U4.2 U4.4 | length 1745.1
  Top Layer w4.92: 1586.54,2189.15 1634,2236.61 U1.26
  Top Layer w10: U4.4 914,1079.28 913,1178.28 913,1179.15 U4.2 921,1179.28 921,1258 v1(906,1273) ; 1586.54,2189.15 1586.54,1952.96 v1(1593.5,1946)
  Bottom Layer w10: v1(906,1273) 987.36,1273 1510.44,1796.08 1510.44,1909.44 1547,1946 v1(1593.5,1946)
pads on no net: D1.2 D2.2 D6.2 D7.2 L2. L3. U1.1 U1.2 U1.3 U1.6 U1.9 U1.10 U1.12 U1.16 U1.19 U1.20 U1.24 U1.27 U1.28 U1.29 U1.33 U2.1 U3.1 U4.1 U4.8 U5.3 U5.5 U5.8 U6.1 U6.8 U7.1 U7.8
copper on no net:
  other v2: 1717.52,2144.09 1760.83,2144.09 1804.14,2144.09 1717.52,2187.4 1760.83,2187.4 1804.14,2187.4 1717.52,2230.71 1760.83,2230.71 1804.14,2230.71

## Text inside footprints (layer, text, board x,y; h text height)
D3: Top Overlay "K" at 1377.17,3255.24 h15 r270; Top Overlay "A" at 1252.17,3345.24 h15 r270
D4: Top Overlay "K" at 1917.17,3275.24 h15 r270; Top Overlay "A" at 1792.17,3365.24 h15 r270
D5: Top Overlay "K" at 2432.17,3245.24 h15 r270; Top Overlay "A" at 2307.17,3335.24 h15 r270
P1: Top Overlay "1" at 2485,1615.32 h50 r90; Top Overlay "2" at 2385,1595.32 h50 r90; Top Overlay "5" at 2485,1994.68 h50 r90; Top Overlay "6" at 2385,1994.68 h50 r90
U5: Top Overlay "TOL" at 380,2287.6 h50; Top Overlay "VAL" at 380,2287.6 h50; Top Overlay "DEV" at 380,2287.6 h50; Top Overlay "PN" at 380,2287.6 h50; Top Overlay "*" at 180,1969.6 h50; Mechanical 1 "RefDes2" at 380,2287.6 h50; Mechanical 1 "*" at 180,1969.6 h50